# Altium PCB CAN_Transceiver.PcbDoc
Units mil, origin at the board's own origin, x right, y up, seen from the top; angles counter-clockwise.
Board outline 2325.55 x 2140.29 mil, 2 copper layers (Top Layer, Bottom Layer); 27 components, 46 nets, 145 pads, 84 vias.
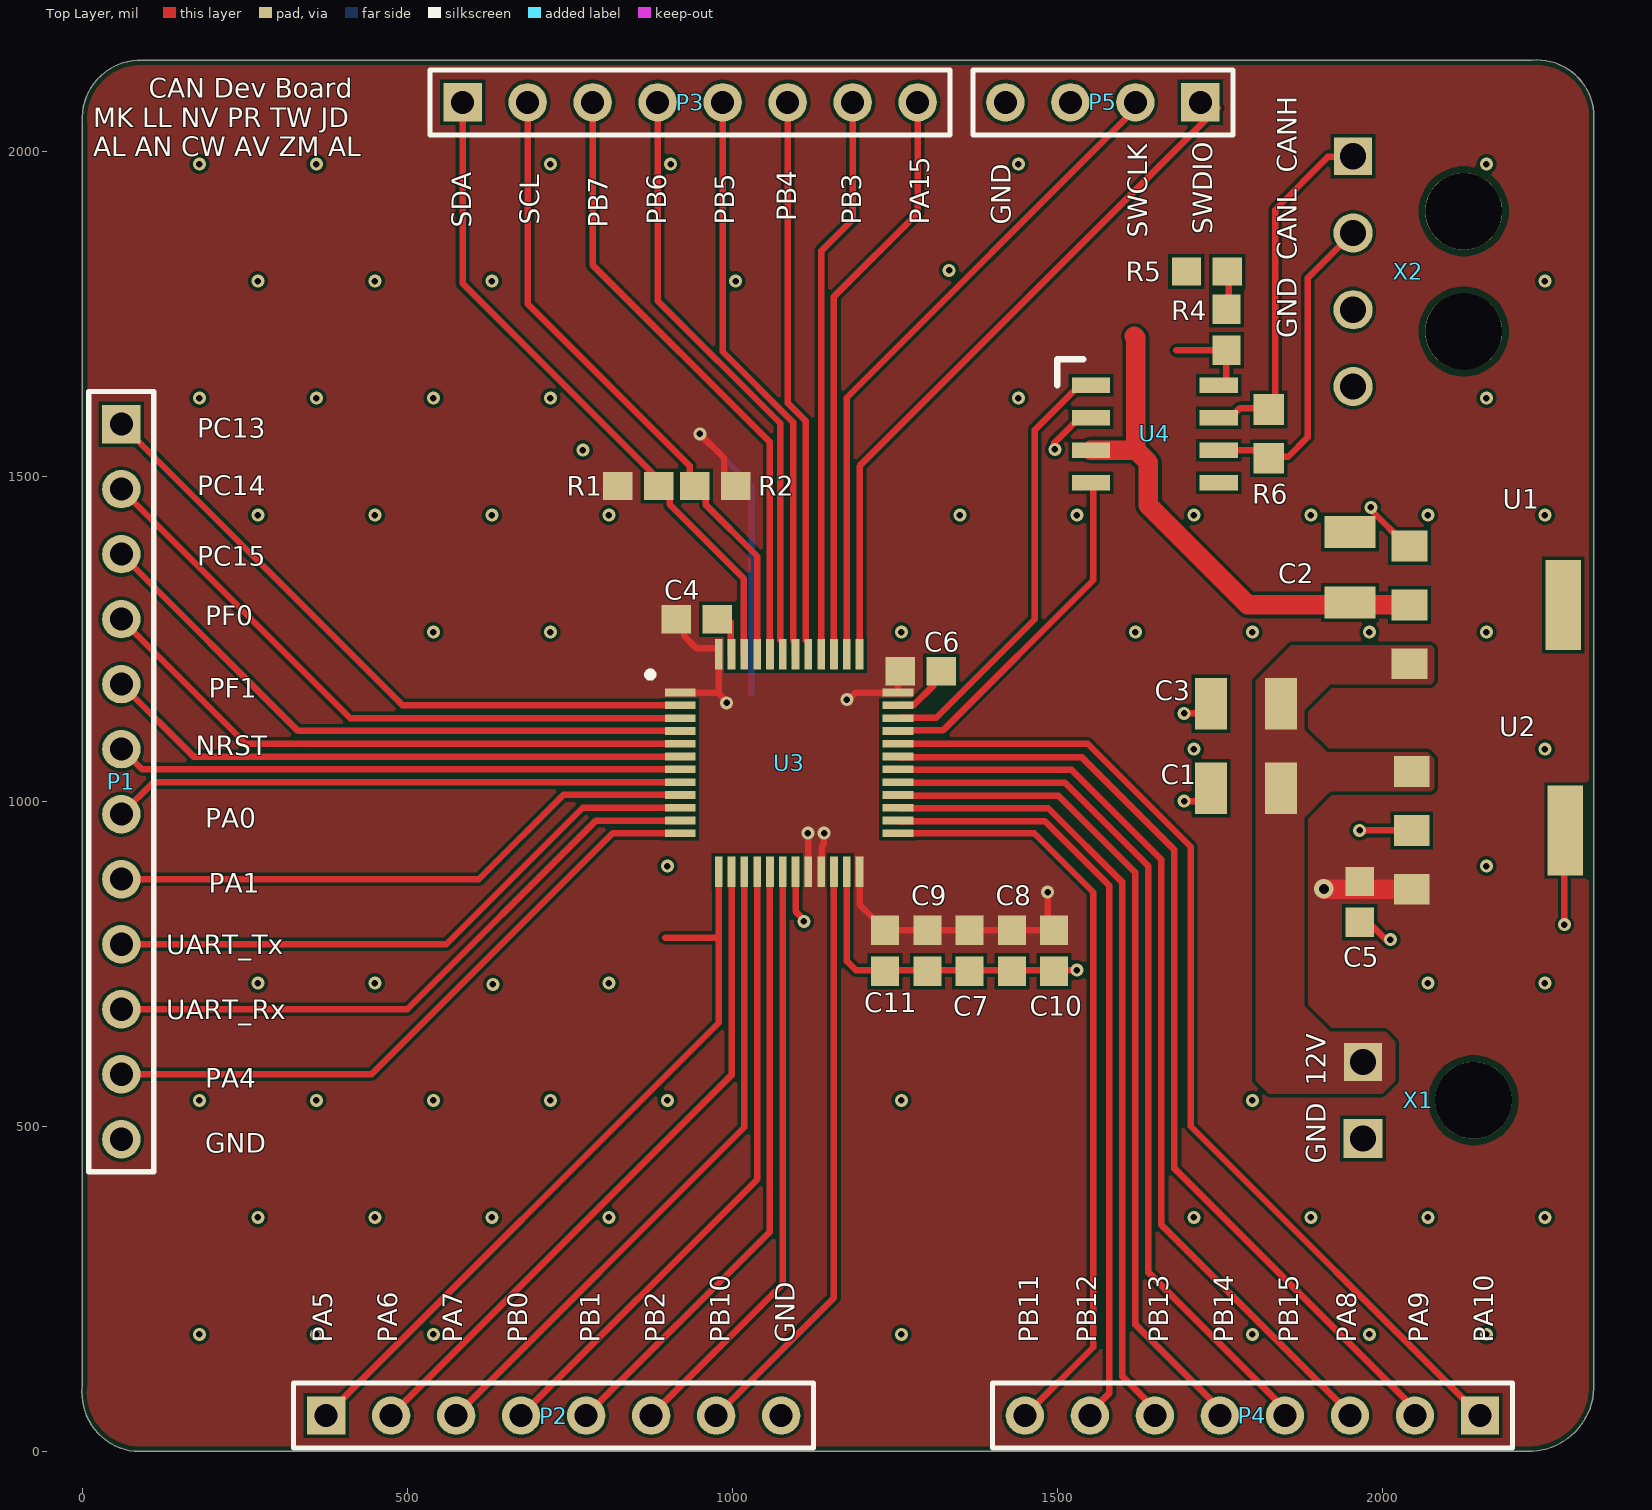
[diagram p0: Top Layer view]
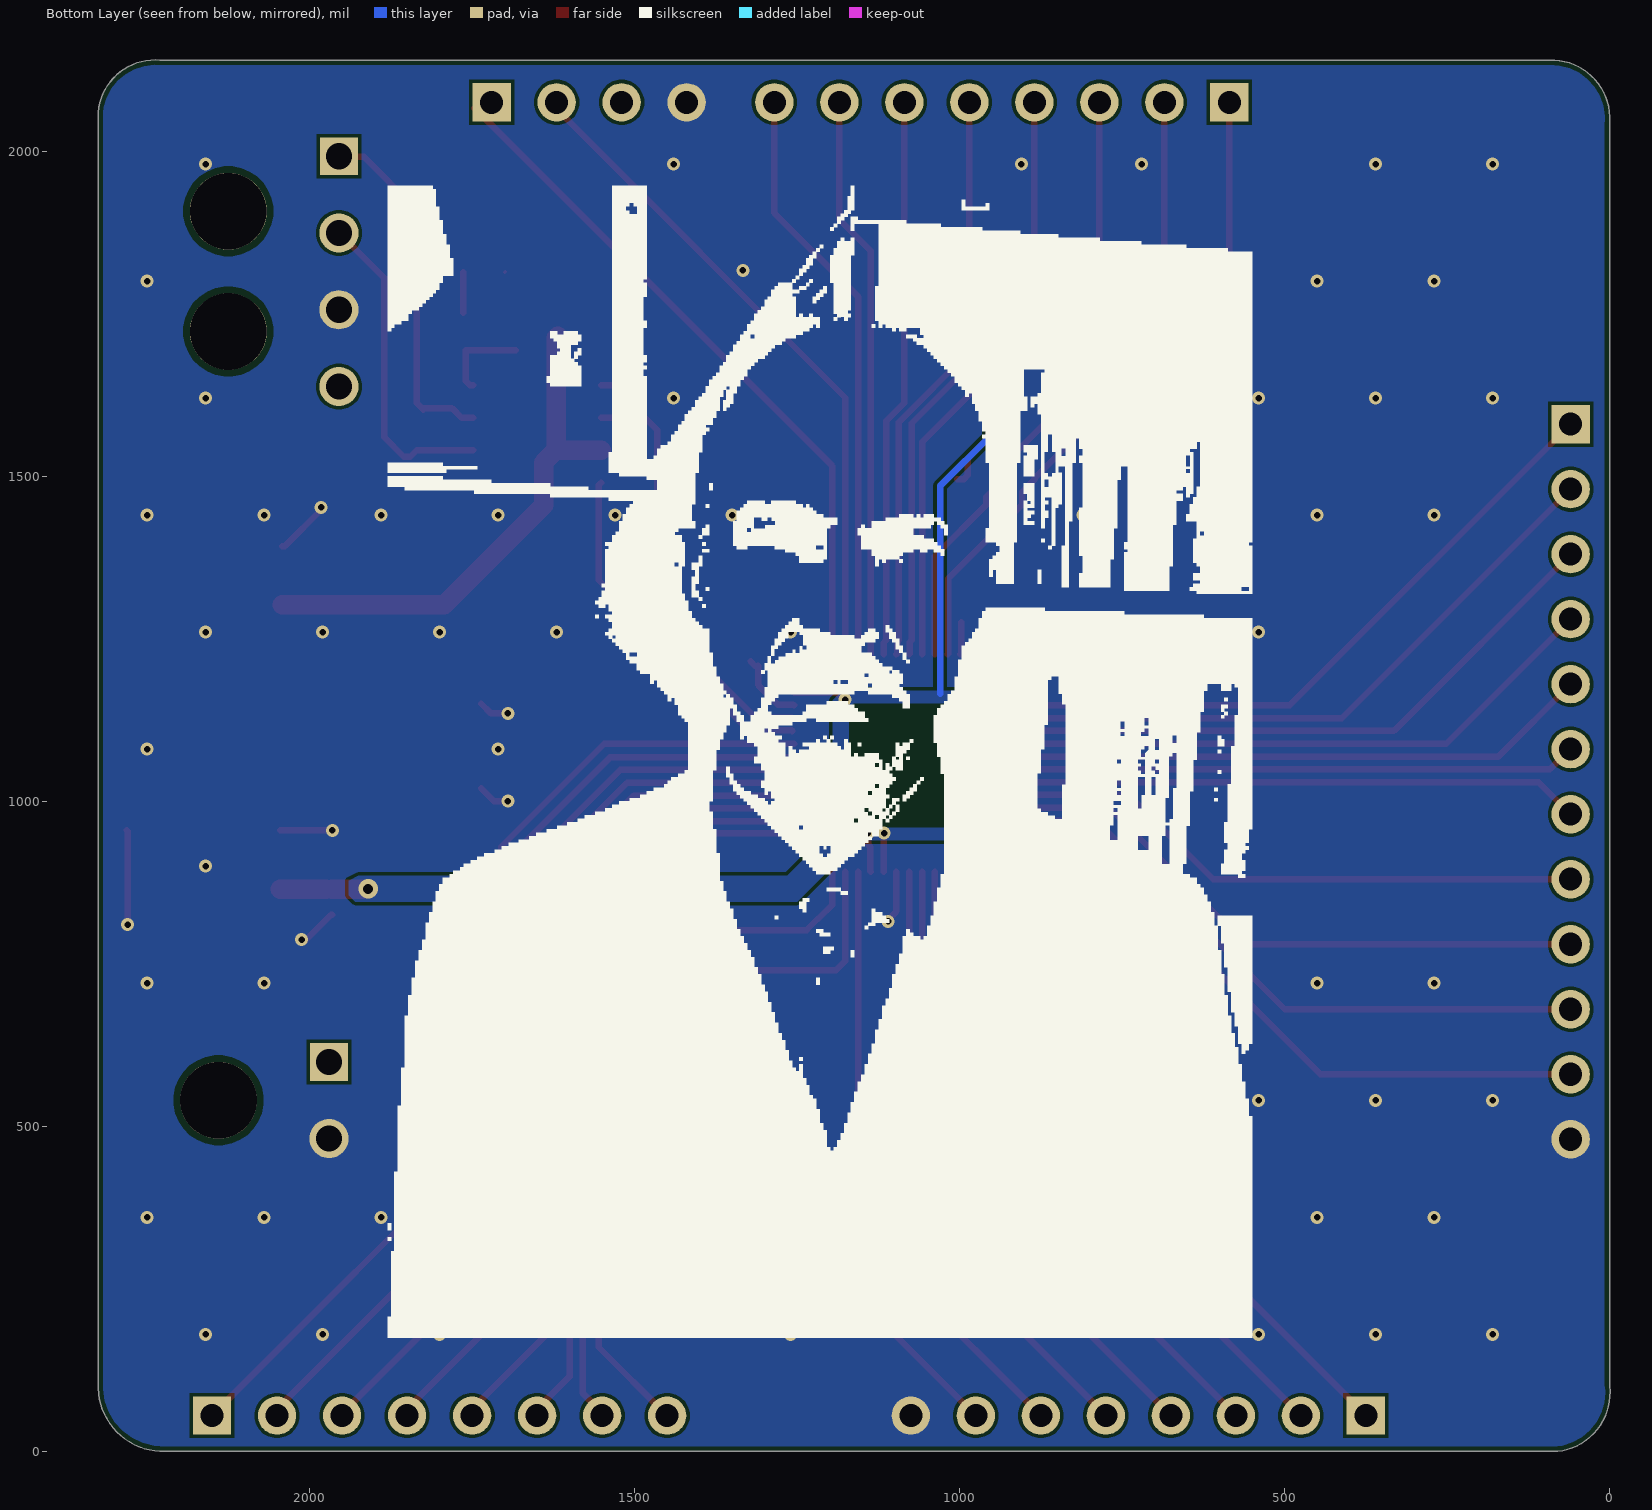
[diagram p1: Bottom Layer view, seen from below]
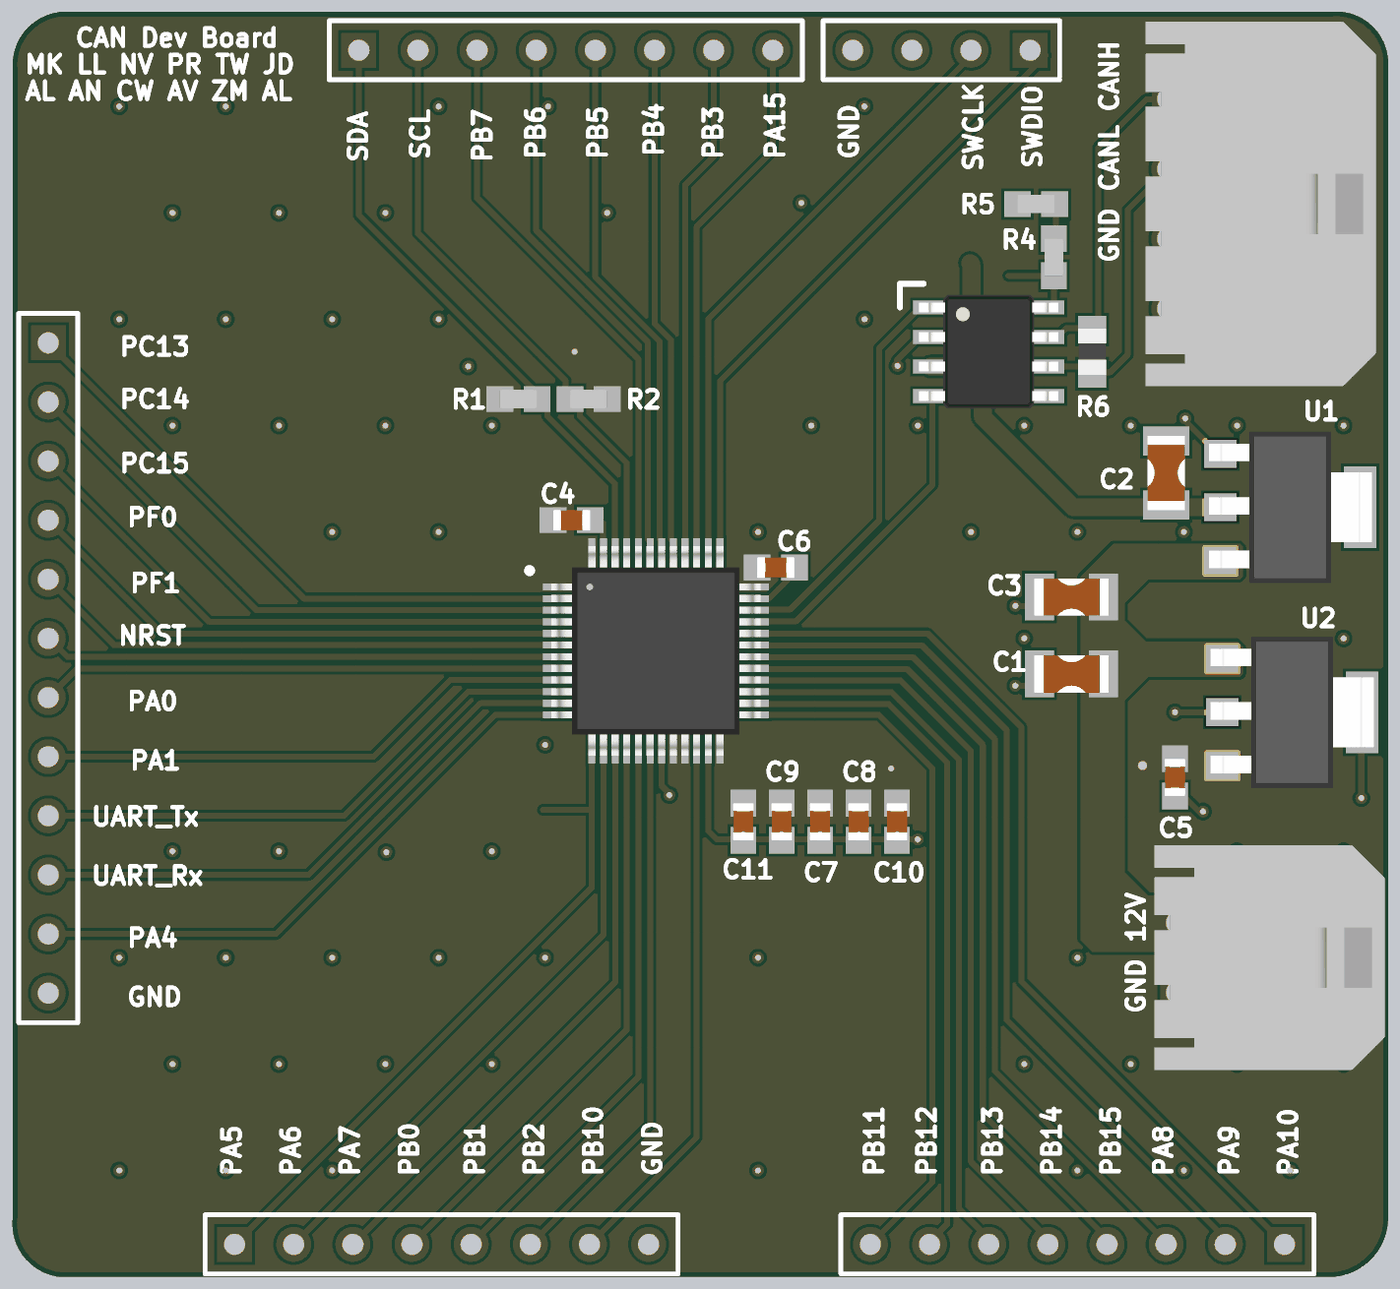
[diagram p2: 3D render of the assembled board from above, using the file's embedded part models]

## Layer stack, top to bottom
Top Solder: solder mask 0.4, Solder Resist, Dk 3.5
Top Layer: signal copper 1.4
Dielectric 1: dielectric 12.6, FR-4, Dk 4.8
Bottom Layer: signal copper 1.4
Bottom Solder: solder mask 0.4, Solder Resist, Dk 3.5

## Board outline
80,0 cw(c90,90) 0,100 0,2045 cw(c90,2050) 85,2140 2230,2140 cw(c2237.5,2052.5) 2325,2060 2325,105 cw(c2225,100) 2230,0

## Design rules (kind name [scope] priority, off if disabled: settings)
BoardOutlineClearance [All] p1: gap=7.87 ignorepadtopadclearanceinfootprint=FALSE
Clearance [All] p1: gap=5 ignorepadtopadclearanceinfootprint=FALSE except(9.84: Arc-Hole Track-Hole SMDPad-Hole THPad-Hole Via-Hole Fill-Hole Poly-Hole Region-Hole Text-Hole)
ComponentClearance [All] p1: gap=5 collisioncheckmode=3 verticalgap=5 showdistances=TRUE
DiffPairsRouting [All] p1: maxlimit=10 minlimit=5 mostfreqgap=5 toplayer_minwidth=5 toplayer_maxwidth=1000 toplayer_prefwidth=5 bottomlayer_minwidth=5 bottomlayer_maxwidth=1000 bottomlayer_prefwidth=5 maxuncoupledlength=500
Height [All] p1: minheight=0 maxheight=71497.94 prefheight=500
HoleSize [All] p1: absolutevalues=TRUE maxlimit=248.03 minlimit=11.81 maxpercent=80.000 minpercent=20.000
HoleToHoleClearance [All] p1: gap=9.84 allowstackedmicrovias=FALSE
MinimumAnnularRing [All] p1: minimumring=3
MinimumSolderMaskSliver [All] p1: minsoldermaskwidth=0
PlaneClearance [All] p1: clearance=5
PlaneConnect PlaneConnectPowerPads [InPadClass('PowerPads')] p1: planeconnectstyle=Direct reliefexpansion=20 reliefentries=4 reliefconductorwidth=10 reliefairgap=10
PlaneConnect [All] p2: pad.planeconnectstyle=Relief pad.reliefexpansion=11.81 pad.reliefentries=4 pad.reliefconductorwidth=5 pad.reliefairgap=5 via.planeconnectstyle=Direct via.reliefexpansion=11.81 via.reliefentries=4 via.reliefconductorwidth=5 via.reliefairgap=5
PolygonConnect PolygonConnectPowerPads [All vs (InPadClass('PowerPads'))] p1: connectstyle=Direct reliefconductorwidth=10 reliefentries=4 polygonreliefangle="90 Angle" airgapwidth=10
PolygonConnect [All] p2: connectstyle=Direct reliefconductorwidth=5 reliefentries=4 polygonreliefangle="90 Angle" airgapwidth=5
RoutingVias [All] p1: holewidth=11.81 width=23.62 viastyle="Through Hole" minholewidth=11.81 minwidth=23.62 maxholewidth=23.62 maxwidth=259.84
SilkToSilkClearance [All] p1: silktosilkclearance=0
SilkToSolderMaskClearance [IsPad] p1: minsilkscreentomaskgap=5 clearancetoexposedcopper=TRUE
SolderMaskExpansion [All] p1: expansion=2.95 istentingtop=TRUE
Width [All] p1: maxlimit=1000 minlimit=5 preferedwidth=5 minimp=50.000000 maximp=50.000000 favimp=50.000000
20 further rules are at their usual default settings.

## Components (designator, comment, footprint, x,y, rotation, side; value= is the part's Value field where it differs from the comment)
C1 "CL31B105KCHNNNE" "CAP-1206 - duplicate" 1795,1020 r180 top
C2 "22 uF +/- 10%" CAP-1206 1950,1360 r270 top
C3 "CL31B105KCHNNNE" "CAP-1206 - duplicate" 1795,1150 r180 top
C4 "CC0603KRX7R0BB104" CAP-0603 945,1280 r180 top
C5 "CC0603KRX5R8BB475" CAP-0603 1965,845 r270 top
C6 "CC0603KRX7R0BB104" CAP-0603 1290,1200 r0 top
C7 "CC0603KRX7R0BB104" CAP-0603 1365,770 r270 top
C8 "UMK107AB7105KA-T" CAP-0603 1430,770 r270 top
C9 "CC0603KRX7R0BB104" CAP-0603 1300,770 r270 top
C10 "UMK107AB7105KA-T" CAP-0603 1495,770 r270 top
C11 "C1608C0G2A103J080AC" CAP-0603 1235,770 r270 top
P1 "Header 12" HDR1X12 60,1580 r270 top
P2 "Header 8" HDR1X8 375,55 r0 top
P3 "Header 8" HDR1X8 585,2075 r0 top
P4 "Header 8" HDR1X8 2150,55 r180 top
P5 "Header 4" HDR1X4 1720,2075 r180 top
R1 "AF0603FR-074K7L" RES-0603 855,1485 r0 top
R2 "AF0603FR-074K7L" RES-0603 973.5,1485 r0 top
R4 "RMCF0603ZT0R00" RES-0603 1760,1725 r270 top
R5 "RC0603FR-0710KP" RES-0603 1730,1815 r0 top
R6 "ERJ-P06J121V" RES-0805 1825,1565 r90 top
U1 "LD1117-5.0" SOT-223-3L 2155,1295 r0 top
U2 "UA78M33CDCYR" SOT-223-4 2163.11,955 r0 top
U3 "STM32G431CBT6" Quad48 1072.56,1045.12 r0 top
U4 "MCP2551-I/SN" IC-BUCK-8SOIC 1650,1565 r270 top
X1 "Molex 43650-0200" 43650-0200 2140,540 r90 top
X2 "Molex - Micro-Fit 3.0 Series connector,  3.00mm (0.118\") pitch header, 4 positions." 43650-0400 2125,1815 r90 top

## Footprints (in the part's own frame and the unit in brackets; to place one, negate y for a bottom-side part, rotate by r counter-clockwise, add the part's x,y. Pads: shape width x height; smd on the part's side, far side on the other; paste and mask are expansions set on the pad)
43650-0200 [mm]
  round 3 hole 3 unplated: 1(0,0)
  rect 1.482x1.482 / inner rect 1.524x1.524 / far side rect 1.482x1.482 hole 1.02: P$1(1.5,4.32)
  rect 1.53x1.53 / inner round 1.524 / far side round 1.53 hole 1.02: P$2(-1.5,4.32)
  body extent -4.82,-4.57 4.83,5.33, height 5.68
43650-0400 [mm]
  round 3 hole 3 unplated: 1(-2.35,0) 1(2.35,0)
  rect 1.482x1.482 / inner rect 1.524x1.524 / far side rect 1.482x1.482 hole 1.02: P$1(4.5,4.32)
  round 1.53 / inner round 1.524 / far side round 1.53 hole 1.02: P$2(1.5,4.32) P$3(-1.5,4.32) P$4(-4.5,4.32)
  body extent -7.82,-4.57 7.83,5.33, height 5.68
CAP-0603 [mm]
  rect 1.15x1.1 smd: 1(-0.8,0) 2(0.8,0)
  body extent -0.8,-0.45 0.8,0.45, height 0.8
CAP-1206 [mm]
  rect 1.25x2 smd: 1(-1.375,0) 2(1.375,0)
  body extent -1.6,-0.8 1.6,0.8, height 1.5
"CAP-1206 - duplicate" [mm]
  rect 1.25x2 smd: 1(-1.248,0) 2(1.502,0)
  body extent -1.47,-0.8 1.73,0.8, height 1.5
HDR1X4 [mm] "Connector; Header; 4 Position"
  rect 1.5x1.5 hole 0.9: 1(0,0)
  round 1.5 hole 0.9: 2(2.54,0) 3(5.08,0) 4(7.62,0)
  silkscreen extent -1.27,-1.27 8.89,1.27
HDR1X8 [mm] "Connector; Header; 8 Position"
  rect 1.5x1.5 hole 0.9: 1(0,0)
  round 1.5 hole 0.9: 2(2.54,0) 3(5.08,0) 4(7.62,0) 5(10.16,0) 6(12.7,0) 7(15.24,0) 8(17.78,0)
  silkscreen extent -1.27,-1.27 19.05,1.27
HDR1X12 [mm] "Connector; Header; 12 Position"
  rect 1.5x1.5 hole 0.9: 1(0,0)
  round 1.5 hole 0.9: 2(2.54,0) 3(5.08,0) 4(7.62,0) 5(10.16,0) 6(12.7,0) 7(15.24,0) 8(17.78,0) 9(20.32,0) 10(22.86,0) 11(25.4,0) 12(27.94,0)
  silkscreen extent -1.27,-1.27 29.21,1.27
IC-BUCK-8SOIC [mm]
  rect 0.6x1.5 smd: 1(-1.905,-2.5) 2(-0.635,-2.5) 3(0.635,-2.5) 4(1.905,-2.5) 5(1.905,2.5) 6(0.635,2.5) 7(-0.635,2.5) 8(-1.905,2.5)
  silkscreen extent -2.92,-3.81 -1.9,-2.79, body extent -2.45,-3 2.45,3, height 1.75
Quad48 [mm]
  rect 1.2x0.3 smd: 1(-3.875,3.1) 2(-3.875,2.6) 3(-3.875,2.1) 4(-3.875,1.6) 5(-3.875,1.1) 6(-3.875,0.6) 7(-3.875,0.1) 8(-3.875,-0.4) 9(-3.875,-0.9) 10(-3.875,-1.4) 11(-3.875,-1.9) 12(-3.875,-2.4) 25(4.625,-2.4) 26(4.625,-1.9) 27(4.625,-1.4) 28(4.625,-0.9) 29(4.625,-0.4) 30(4.625,0.1) 31(4.625,0.6) 32(4.625,1.1) 33(4.625,1.6) 34(4.625,2.1) 35(4.625,2.6) 36(4.625,3.1)
  rect 0.3x1.2 smd: 13(-2.375,-3.9) 14(-1.875,-3.9) 15(-1.375,-3.9) 16(-0.875,-3.9) 17(-0.375,-3.9) 18(0.125,-3.9) 19(0.625,-3.9) 20(1.125,-3.9) 21(1.625,-3.9) 22(2.125,-3.9) 23(2.625,-3.9) 24(3.125,-3.9) 37(3.125,4.6) 38(2.625,4.6) 39(2.125,4.6) 40(1.625,4.6) 41(1.125,4.6) 42(0.625,4.6) 43(0.125,4.6) 44(-0.375,4.6) 45(-0.875,4.6) 46(-1.375,4.6) 47(-1.875,4.6) 48(-2.375,4.6)
  silkscreen extent -5.16,3.69 -4.94,3.91, body extent -4.12,-4.15 4.87,4.85, height 1.6
RES-0603 [mm]
  rect 1.15x1.1 smd: 1(-0.8,0) 2(0.8,0)
  body extent -0.8,-0.4 0.8,0.4, height 0.43
RES-0805 [mm]
  rect 1.2x1.2 smd: 1(-0.95,0) 2(0.95,0)
  body extent -1,-0.6 1,0.6, height 0.71
SOT-223-3L [mm]
  rect 1.4x1.2 smd mask+0.07: 1(-2.875,2.475) 2(-2.875,0.175) 3(-2.875,-2.125)
  rect 1.4x3.5 smd: 4(3.125,0.175)
  body extent -3.37,-3.08 3.62,3.43, height 1.68
SOT-223-4 [mm]
  rect 1.4x1.2 smd mask+0.07: 1(-3,2.3) 2(-3,0) 3(-3,-2.3)
  rect 1.4x3.5 smd: 2(3,0)
  body extent -3.5,-3.25 3.5,3.25, height 1.68

## Part data
C1 C3: library part CAP-1U-0001, "1 µF ±10% 100V Ceramic Capacitor X7R 1206 (3216 Metric)", Capacitance="1 uF +/- 10%", Voltage=100V
C2: library part CAP-22U-0002, "22 µF Molded Tantalum Capacitors 16 V 1206 (3216 Metric)"
C4 C7 C9: library part CAP-100N-0002-JLC, "100V 100nF X7R ±10% 0603 Multilayer Ceramic Capacitors MLCC - SMD/SMT ROHS", Capacitance="100 nF", JLC part number=C113803, Voltage=100V, Assembled?=yes
C5: library part CAP-4.7U-0002-JLC, "25V 4.7uF X5R ±10% 0603 Multilayer Ceramic Capacitors MLCC - SMD/SMT ROHS", Capacitacen="4.7 uF", JLC part number=C326580, Voltage=25V, assembled=yes
C6: library part CAP-100N-0002-JLC, "100V 100nF X7R ±10% 0603 Multilayer Ceramic Capacitors MLCC - SMD/SMT ROHS", Capacitance="100 nF +/- 10%", JLC part number=C113803, Voltage=100V, Assembled?=yes
C8 C10: library part CAP-1U-0002, "1 µF ±10% 50V Ceramic Capacitor X7R 0603 (1608 Metric)", Capacitance="1 uF", Package Size=0603, Voltage=50V
C11: library part CAP-10N-0002, "CAP CER 10000PF 100V C0G 0603", Capacitance=10nF, Manufacturer="TDK Corporation", Package Size=0603, Temperature Coefficient=C0G/NP0, Voltage Rating=100V, Assembled?=no, Manufacturer Part Number=C1608C0G2A103J080AC
P1: "Header, 12-Pin", LatestRevisionDate=17-Jul-2002, LatestRevisionNote="Re-released for DXP Platform.", Publisher="Altium Limited"
P2 P3 P4: "Header, 8-Pin", LatestRevisionDate=17-Jul-2002, LatestRevisionNote="Re-released for DXP Platform.", Publisher="Altium Limited"
P5: "Header, 4-Pin", LatestRevisionDate=17-Jul-2002, LatestRevisionNote="Re-released for DXP Platform.", Publisher="Altium Limited"
R1 R2: library part RES-4.7K-0002, "RES SMD 4.7K OHM 1% 1/10W 0603", Manufacturer=YAGEO, Package Size=0603, Power Rating=1/10W, Resistance="4.7kOhm +/-1%", Assembled?=no, Manufacturer Part Number=AF0603FR-074K7L
R4: library part RES-0-0001, "0 Ohms Jumper 0.1W, 1/10W Chip Resistor 0603 (1608 Metric) Automotive AEC-Q200 Thick Film", Package Size=0603, Power="1/10 W", Resistance="0 Ohm"
R5: library part RES-10K-0002, "RES SMD 10K OHM 1% 1/10W 0603", Manufacturer=YAGEO, Package Size=0603, Power Rating=1/10W, Resistance="10kOhm +/-1%", Assembled?=no, Manufacturer Part Number=RC0603FR-0710KP
R6: library part RES-120-0001, "120 Ohms ±5% 0.5W, 1/2W Chip Resistor 0805 (2012 Metric) Automotive AEC-Q200, Pulse Withstanding Thick Film", Power="0.5 W", Resistance="120 Ohms +/-5%"
U1: library part LDO-5V-0002, "1A 60dB@(120Hz) Fixed 5V~5V Positive 18V SOT-223  Linear Voltage Regulators (LDO) ROHS", Current=1A, VIn=12V, Vout=5V
U2: library part LDO-3.3V-0002, "Linear Voltage Regulator IC Positive Fixed 1 Output 500mA SOT-223-4", Current="500 mA", Package=SOT-223-4, VIn=25V, Vout=3.3V
U3: library part IC-STM32G431CBT6-0001, "ARM® Cortex®-M4F STM32G4 Microcontroller IC 32-Bit Single-Core 170MHz 128KB (128K x 8) FLASH 48-LQFP (7x7)"
U4: library part IC-CAN-TRANSCEIVER-0001, "1/1 Transceiver Half CANbus 8-SOIC", Bitrate="1 Mbps"
X1: library part "Micro-Fit Molex 2 Pin Right Angle", Package=43650-0200, DeviceName=43650-0200, DeviceSetName=HEADER_POS2_?, GateName_1=G$1, LibraryName=con-molex-micro-fit-3_0_2, SymbolName_1=HEADER_POS2
X2: library part HEADER_POS4_?43650-0400, Package=43650-0409, DeviceName=43650-0409, DeviceSetName=HEADER_POS4_?, GateName_1=G$1, LibraryName=con-molex-micro-fit-3_0_2, SymbolName_1=HEADER_POS4

## Via types
v1: diameter 20, hole 10, Top Layer to Bottom Layer, tented both sides, 83 vias
v2: diameter 30, hole 15, Top Layer to Bottom Layer, tented both sides, 1 vias

## Nets (pads, with @x,y where several pads share a name; then routed paths per layer and width w, separated by ;. In a path a pad name is that pad's centre, name@x,y a point inside that pad or via, vN(x,y) a via of type N, cw(c..) or ccw(c..) an arc to the next point about the centre after c; other vN are vias at no path point)
3.3V_Main: C4.2 C5.1 C6.1 C7.1 C8.1 C9.1 C10.1 C11.1 R1.1 R2.2 U2.3 U3.1 U3.20 U3.21 U3.24 U3.36 U3.48 | length 1574.7
  Top Layer w5: U3.48@977.35,1235 979.06,1233.29 U3.48 ; C10.1@1485,811.5 C10.1
  Top Layer w10: C4.2@908.5,1285 C4.2 ; U3.1 977.62,1167.16 979.06,1165.73 ; C4.2@923.5,1280 925.8,1277.71 925.8,1254.2 945,1235 U3.48@977.35,1235 ; v1(950,1565) 987.36,1527.64 987.36,1501.65 994.02,1495 R2.2@1003.35,1495 ; U3.48 979.06,1165.73 ; v1(990.98,1151.1) 990.98,1153.81 979.06,1165.73 ; v1@1115,950 1116.85,948.15 U3.20 ; U3.21 1137.44,892.48 1137.44,930.2 1140.82,933.58 1140.82,950.95 v1(1140.98,951.1) ; v1(1175.98,1156.1) 1178.69,1156.1 1189.75,1167.16 U3.36 C6.1@1254.65,1210 ; U3.24 1195.59,840.91 1217.36,819.13 1218.35,819.13 1235,802.48 C11.1 C9.1 C7.1 C8.1 C10.1 ; C10.1@1485,811.5 v1(1485,860)
  Top Layer w30: v2(1910,865) 1910.32,864.68 C5.1@1965,864.68 ; C5.1@1975,864.68 1975.24,864.45 U2.3
  Bottom Layer w10: v1(950,1565) 1030,1485 1030,1165
  other v1: 1115.98,951.1
5V_Main: C2.2 U1.2 U4.3 | length 803.4
  Top Layer w30: U4.3 1620.85,1540 ; 1618.5,1715 1620.85,1712.65 1620.85,1540 ; U1.2 1850,1301.89 1793.11,1301.89 1640,1455 1640,1520.85 1620.85,1540
12V_Main: C1.1 C3.1 U1.3 U2.1 X1.P$1
CAN_Rx: U3.33 U4.4 | length 545.4
  Top Layer w10: U3.33@1257.09,1107.99 1257.99,1108.9 1323.9,1108.9 1555,1340 1555,1486.57 U4.4
CAN_Tx: U3.34 U4.1 | length 677.2
  Top Layer w10: U3.34@1257.09,1127.68 1257.99,1128.58 1313.58,1128.58 1465,1280 1465,1571.14 1533.86,1640 U4.1
CANH: R6.2 U4.7 X2.P$1 | length 554.2
  Top Layer w10: U4.7 1766.14,1590 1780.94,1604.8 R6.2@1827.4,1604.8 ; R6.2 R6.2@1827.4,1604.8 ; X2.P$1@1940.38,2015.38 1940.38,2001.24 1930.76,1991.61 1916.61,1991.61 1835,1910 1835,1612.4 R6.2@1827.4,1604.8
CANL: R6.1 U4.6 X2.P$2 | length 475.9
  Top Layer w10: U4.6 1835,1540 1845,1530 1854.92,1530 1885,1560.08 1885,1805 X2.P$2@1940,1860
GND: C1.2 C2.1 C3.2 C4.1 C5.2 C6.2 C7.2 C8.2 C9.2 C10.2 C11.2 P1.12 P2.8 P5.4 R5.1 U1.1 U2.2 U3.19 U3.23 U3.35 U3.47 U4.2 X1.P$2 X2.P$3 | length 1290.9
  Top Layer w5: R5.1 R5.1@1700,1813.5
  Top Layer w10: C4.1@997.83,1275 997.83,1227.13 U3.47 ; U3.19 1097.17,830.54 1110,817.71 v1(1110,815) ; U3.23 1175.91,754.09 1190,740 1235,740 1300,740 1365,740 1430,740 v1(1530,740) ; U3.35 1255.55,1148.39 1279.54,1148.39 1310,1178.85 C6.2@1310,1208.5 ; C6.2@1315,1208.5 C6.2@1321.5,1215 ; v1@1495,1540 1495,1551.14 1533.86,1590 U4.2 ; v1(1695,1000) 1716.26,1000 1735.87,1019.61 C1.2 ; v1(1695,1135) 1720.87,1135 C3.2 ; C5.2@1965,825.32 1966.97,825.32 2007.28,785 v1@2010,785 ; v1(1965,955) U2.2@2045,955 ; v1@1980,1450 1980.32,1450 2037.87,1392.44 U1.1 ; v1(2280,810) 2280,953.78 U2.2@2281.22,955
  other v1: 180,180 360,180 540,180 1260,180 1800,180 1980,180 2160,180 270,360 450,360 630,360 810,360 1710,360 1890,360 2070,360 2250,360 180,540 360,540 540,540 720,540 900,540 1260,540 1800,540 631.64,718.36 270,720 450,720 810,720 2070,720 2250,720 2012.3,787.18 900,900 2160,900 1710,1080 2250,1080 540,1260 720,1260 1260,1260 1620,1260 1800,1260 1980,1260 2160,1260 270,1440 450,1440 630,1440 810,1440 1350,1440 1530,1440 1710,1440 1890,1440 2070,1440 2250,1440 1982.3,1452.18 770,1540 1495.98,1541.1 180,1620 360,1620 540,1620 720,1620 1440,1620 2160,1620 270,1800 450,1800 630,1800 1005,1800 2250,1800 1333.36,1816.64 180,1980 360,1980 720,1980 905,1980 1440,1980 2160,1980
I2C1_SCL: P3.2 R2.1 U3.45 | length 987.5
  Top Layer w10: P3.2 685,1765.32 934.52,1515.8 934.52,1501.65 R2.1@943.14,1493.03 ; R2.1 942.1,1485 958.76,1468.35 958.76,1456.24 1038.11,1376.89 U3.45
I2C1_SDA: P3.1 R1.2 U3.46 | length 1028.3
  Top Layer w10: P3.1 585,1796.65 884.68,1496.97 884.68,1495 903.5,1476.18 903.5,1456.5 1017.52,1342.48 1017.52,1227.13 U3.46
NetR4_1: R4.1 R5.2 | length 62.3
  Top Layer w10: R4.1@1763.86,1751.34 R5.2@1763.86,1813.66
NRST: P1.6 U3.7 | length 886.1
  Top Layer w10: P1.6 61.08,1080 92.03,1049.06 U3.7
  Bottom Layer w10: P1.6 P1.6@69.39,1089.39
PA0: P1.7 U3.8 | length 880.4
  Top Layer w10: P1.7 109.37,1029.37 U3.8
PA1: P1.8 U3.9 | length 913.7
  Top Layer w10: P1.8 610,880 739.68,1009.68 U3.9
PA4: P1.11 U3.12 | length 1013.5
  Top Layer w10: P1.11 445,580 815.63,950.63 U3.12
PA5: P2.1 U3.13 | length 1169.3
  Top Layer w10: P2.1 979.06,659.06 979.06,790 ; 896.5,790 979.06,790 ; U3.13 979.06,790
PA6: P2.2 U3.14 | length 1053.5
  Top Layer w10: P2.2 998.74,578.74 U3.14
PA7: P2.3 U3.15 | length 1020.2
  Top Layer w10: P2.3 1018.43,498.43 U3.15
PA8: P4.3 U3.30 | length 1432
  Top Layer w10: U3.30 1255.55,1048.15 1521.85,1048.15 1660,910 1660,348.28 1943.28,65 P4.3@1950,65
PA9: P4.2 U3.31 | length 1498.2
  Top Layer w10: U3.31 1255.55,1067.83 1537.17,1067.83 1680,925 1680,435 P4.2@2050,65
PA10: P4.1 U3.32 | length 1575.3
  Top Layer w10: U3.32 1546.58,1088.42 1705,930 1705,500 P4.1
PA15: P3.8 U3.39 | length 913.1
  Top Layer w10: U3.39 1156.22,1776.22 1285,1905 P3.8@1285,2085.94
PB0: P2.4 U3.16 | length 987
  Top Layer w10: P2.4 1038.11,418.11 U3.16
PB1: P2.5 U3.17 | length 953.7
  Top Layer w10: P2.5 1057.8,337.8 U3.17
PB2: P2.6 U3.18 | length 920.4
  Top Layer w10: P2.6 1077.48,257.48 U3.18
PB3: P3.7 U3.40 | length 876.5
  Top Layer w10: U3.40 1136.54,1846.54 1185,1895 P3.7@1185,2082.64
PB4: P3.6 U3.41 | length 874.6
  Top Layer w10: P3.6@1085,2087.58 1085,1612.43 1113.07,1584.36 1113.07,1247.72 1116.85,1243.94 U3.41
PB5: P3.5 U3.42 | length 901.4
  Top Layer w10: P3.5@985,2081.13 985,1691.21 1093.39,1582.83 1093.39,1247.72 1096.26,1244.84 1096.26,1227.13 U3.42
PB6: P3.4 U3.43 | length 938.7
  Top Layer w10: P3.4@885,2085.24 885,1770 1073.7,1581.3 1073.7,1247.72 1076.57,1244.84 1076.57,1227.13 U3.43
PB7: P3.3 U3.44 | length 965.7
  Top Layer w10: P3.3@785,2078.97 785,1824.95 1057.8,1552.15 U3.44
PB10: P2.7 U3.22 | length 911.6
  Top Layer w10: P2.7 1156.22,236.22 U3.22
PB11: P4.8 U3.25 | length 1186.4
  Top Layer w10: U3.25 1464.37,950.63 1555,860 1555,160 P4.8
PB12: P4.7 U3.26 | length 1194.3
  Top Layer w10: U3.26 1255.55,969.41 1480.59,969.41 1580,870 1580,89.69 1550,59.69 P4.7
PB13: P4.6 U3.27 | length 1223.7
  Top Layer w10: U3.27 1255.55,989.09 1485.91,989.09 1600,875 1600,115 P4.6@1650,65
PB14: P4.5 U3.28 | length 1293.8
  Top Layer w10: U3.28 1255.55,1008.78 1501.22,1008.78 1620,890 1620,195 P4.5@1750,65
PB15: P4.4 U3.29 | length 1360.9
  Top Layer w10: U3.29 1255.55,1028.46 1511.54,1028.46 1640,900 1640,275 P4.4@1850,65
PC13: P1.1 U3.2 | length 1039.2
  Top Layer w10: P1.1 492.52,1147.48 U3.2
PC14: P1.2 U3.3 | length 1005.9
  Top Layer w10: P1.2 412.2,1127.8 U3.3
PC15: P1.3 U3.4 | length 972.6
  Top Layer w10: P1.3 331.89,1108.11 U3.4
PF0: P1.4 U3.5 | length 939.4
  Top Layer w10: P1.4 251.57,1088.42 U3.5
PF1: P1.5 U3.6 | length 906.1
  Top Layer w10: P1.5 171.26,1068.74 U3.6
Rs: R4.2 U4.8 | length 138
  Top Layer w10: 1683.1,1693.5 R4.2 1760,1646.81 1753.19,1640 U4.8
SWCLK: P5.2 U3.38 | length 1032.9
  Top Layer w10: U3.38 1175.75,1226.38 1175.75,1620.75 1620,2065 P5.2
SWDIO: P5.1 U3.37 | length 1068.2
  Top Layer w10: U3.37 1195.59,1515.59 P5.1@1746.33,2066.33
USART2_Rx: P1.10 U3.11 | length 980.3
  Top Layer w10: P1.10 500,680 790.32,970.32 U3.11
USART2_Tx: P1.9 U3.10 | length 947
  Top Layer w10: P1.9 560,780 770,990 U3.10
pads on no net: P5.3 U1.4 U4.5 X1.1 X2.1 X2.P$4

## Polygon pours and split planes (outlines as drawn)
3.3V_Main on Top Layer "3.3V_MAIN_L01_P005" (solid, pour order 5): 80,0 cw(c90,90) 0,100 0,2045 cw(c90,2050) 85,2140 2230,2140 cw(c2237.5,2052.5) 2325,2060 2325,105 cw(c2225,100) 2230,0
12V_Main on Top Layer "12V_MAIN_L01_P000" (solid, pour order 0): 1805,1175 1805,1185 1860,1240 1880,1240 1880,1185 1925,1185 1880,1140 1880,685 1920,645 2005,645 2020,630 2020,570 2000,550 1825,550 1805,570
12V_Main on Top Layer "12V_MAIN_L01_P002" (solid, pour order 2): 1870,1110 1880,1110 1915,1075 2070,1075 2080,1065 2080,1020 2075,1015 1920,1015 1875,970 1870,970
12V_Main on Top Layer "12V_MAIN_L01_P001" (solid, pour order 1): 1870,1240 2075,1240 2080,1235 2080,1185 2075,1180 1870,1180
GND on Bottom Layer "GND_L02_P006" (solid, pour order 6): 80,0 cw(c90,90) 0,100 0,2045 cw(c90,2050) 85,2140 2230,2140 cw(c2237.5,2052.5) 2325,2060 2325,105 cw(c2225,100) 2230,0
3.3V_Main on Bottom Layer "3.3V_MAIN_L02_P003" (solid, pour order 3): 1925,885 1940,877.5 1940,855 1930,845 1250,845 1155,940 990,940 975,955 975,1150 995,1170 1180,1170 1195,1155 1195,955 1265,885 1925,885 1935,875

## Other copper
Bottom Layer:
  pour cut-out: 1010,1150 1000,1140 1000,960 1155,960 1170,975 1170,1145.3 1162.73,1150

## Silkscreen, mask and mechanical layers (free items; w line width, h text height)
Top Overlay:
  text "CAN Dev Board" at 102,2082 h30
  text "MK LL NV PR TW JD" at 17,2037 h30
  text "AL AN CW AV ZM AL" at 17,1992 h30
  text "CANH" at 1868,1967 h30 r90
  text "PB4" at 1098,1892 h30 r90
  text "SCL" at 703,1887 h30 r90
  text "PB6" at 898,1887 h30 r90
  text "PB5" at 1003,1887 h30 r90
  text "PB3" at 1198,1887 h30 r90
  text "PA15" at 1303,1887 h30 r90
  text "GND" at 1428,1887 h30 r90
  text "SDA" at 598,1882 h30 r90
  text "PB7" at 808,1882 h30 r90
  text "SWDIO" at 1738,1872 h30 r90
  text "SWCLK" at 1638,1867 h30 r90
  text "CANL" at 1868,1832 h30 r90
  text "GND" at 1868,1712 h30 r90
  text "PC13" at 177,1559.36 h30
  text "PC14" at 177,1470.65 h30
  text "PC15" at 177,1362 h30
  text "PF0" at 189.5,1270.65 h30
  text "PF1" at 194.49,1159.36 h30
  text "NRST" at 174.5,1070.65 h30
  text "PA0" at 189.5,959.36 h30
  text "PA1" at 194.49,859.36 h30
  text "UART_Tx" at 129.52,764.36 h30
  text "UART_Rx" at 129.52,664.36 h30
  text "12V" at 1913,562 h30 r90
  text "PA4" at 189.5,559.36 h30
  text "GND" at 189.5,459.36 h30
  text "GND" at 1913,442 h30 r90
  text "PA5" at 384.35,167 h30 r90
  text "PA6" at 484.35,167 h30 r90
  text "PA7" at 584.35,167 h30 r90
  text "PB0" at 684.35,167 h30 r90
  text "PB1" at 795.64,167 h30 r90
  text "PB2" at 895.64,167 h30 r90
  text "PB10" at 995.64,167 h30 r90
  text "GND" at 1095.64,167 h30 r90
  text "PB11" at 1470.64,167 h30 r90
  text "PB12" at 1559.35,167 h30 r90
  text "PB13" at 1670.64,167 h30 r90
  text "PB14" at 1770.64,167 h30 r90
  text "PB15" at 1870.64,167 h30 r90
  text "PA8" at 1959.35,167 h30 r90
  text "PA9" at 2070.64,167 h30 r90
  text "PA10" at 2170.64,167 h30 r90
Bottom Overlay:
  drawing of 78 lines, arcs and shapes, not listed
Bottom Solder:
  the board outline again, w10